# Altium PCB tank_control.PcbDoc
Units mm, origin at the board's own origin, x right, y up, seen from the top; angles counter-clockwise.
Board outline 100 x 100 mm, 2 copper layers (Top Layer, Bottom Layer); 18 components, 21 nets, 120 pads, 0 vias.
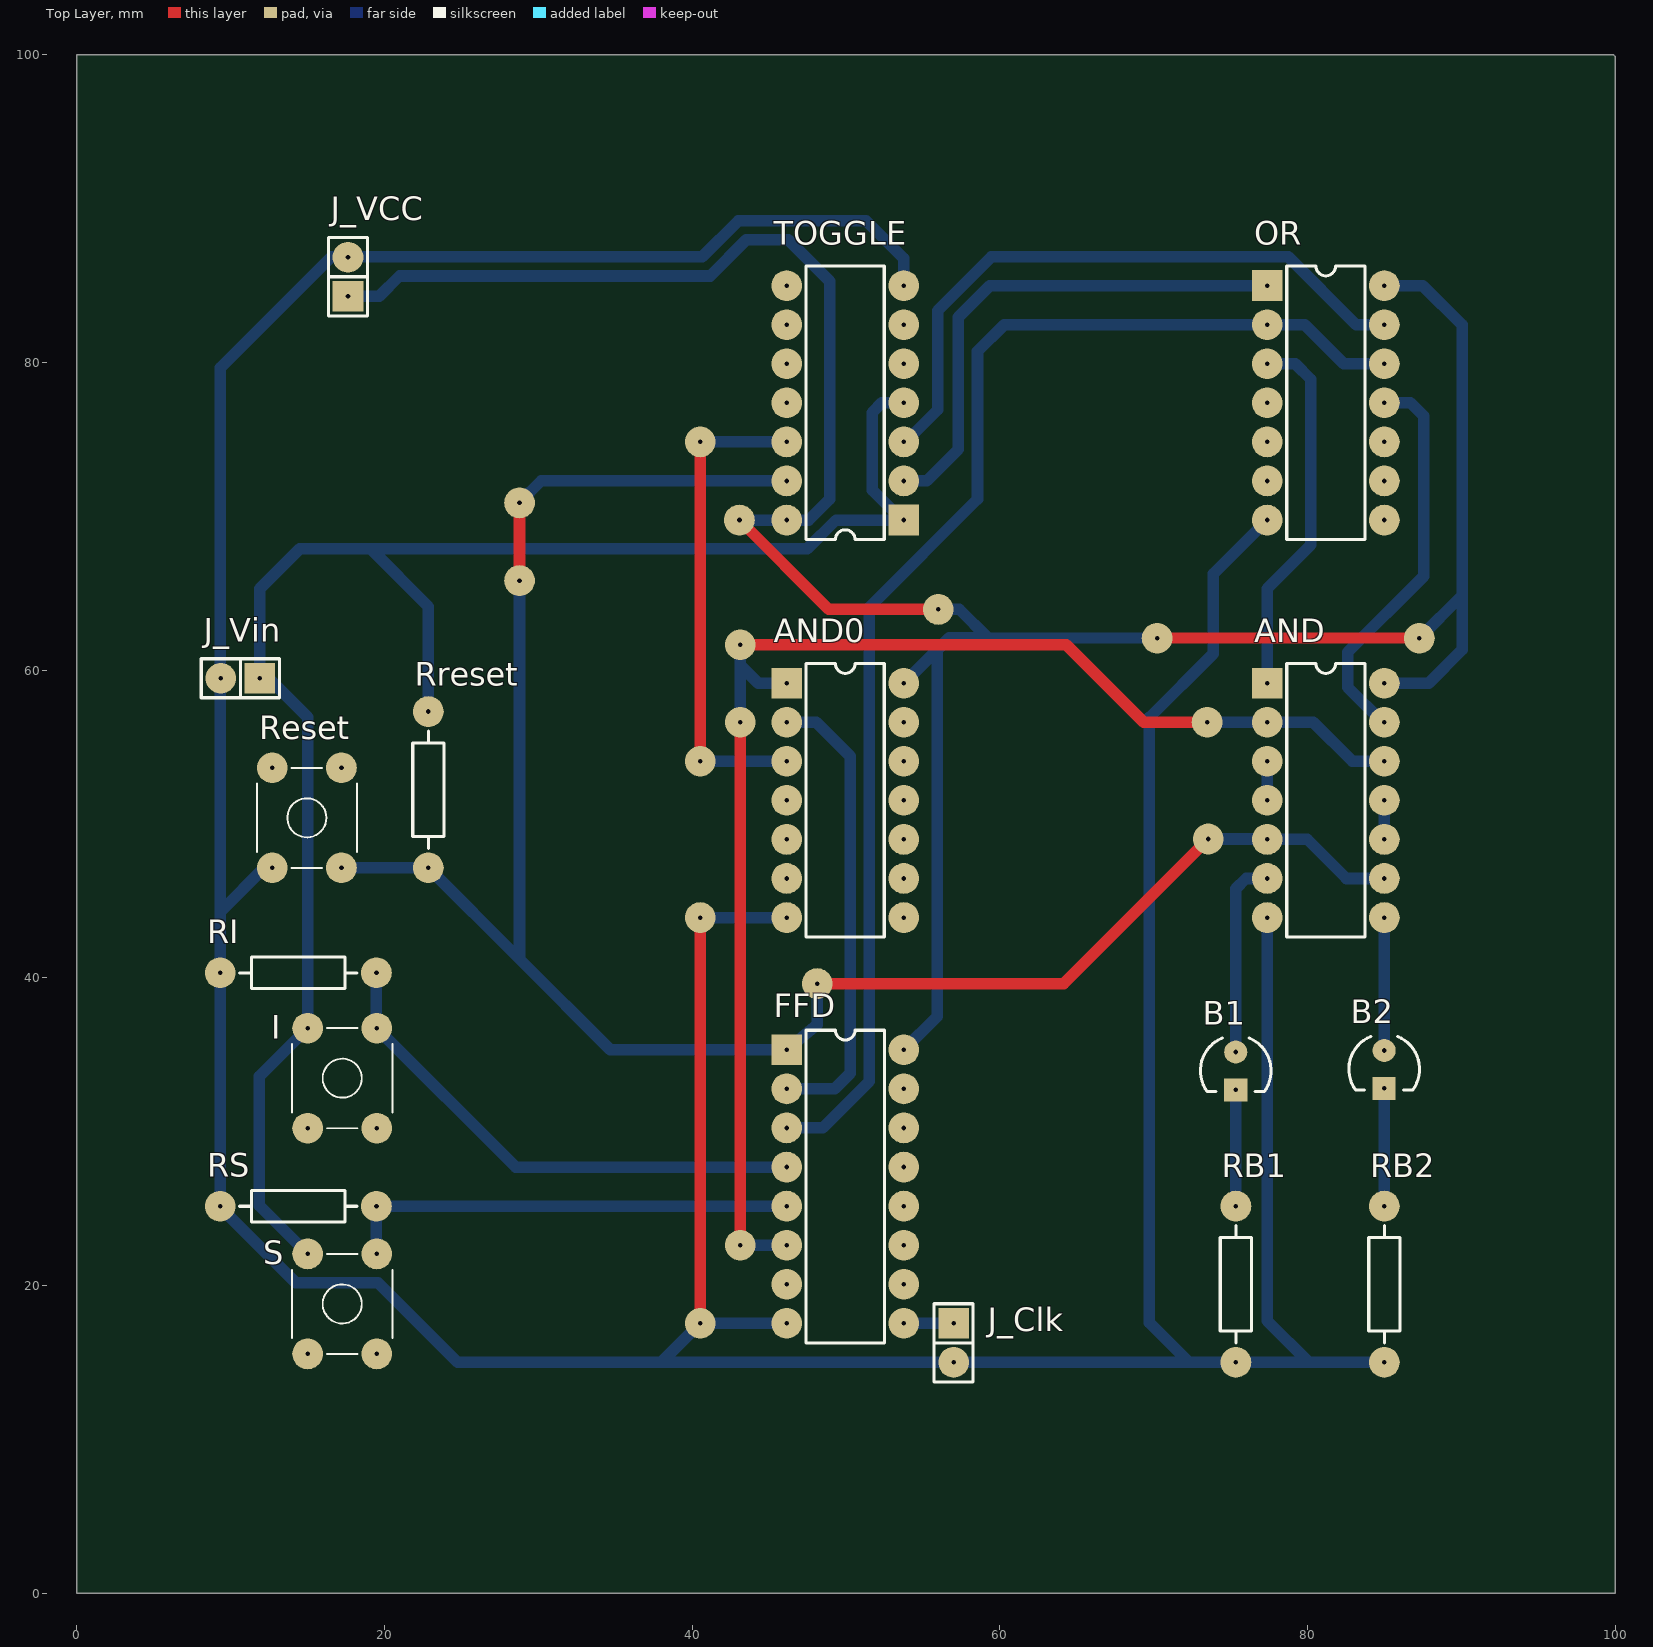
[diagram p0: Top Layer view]
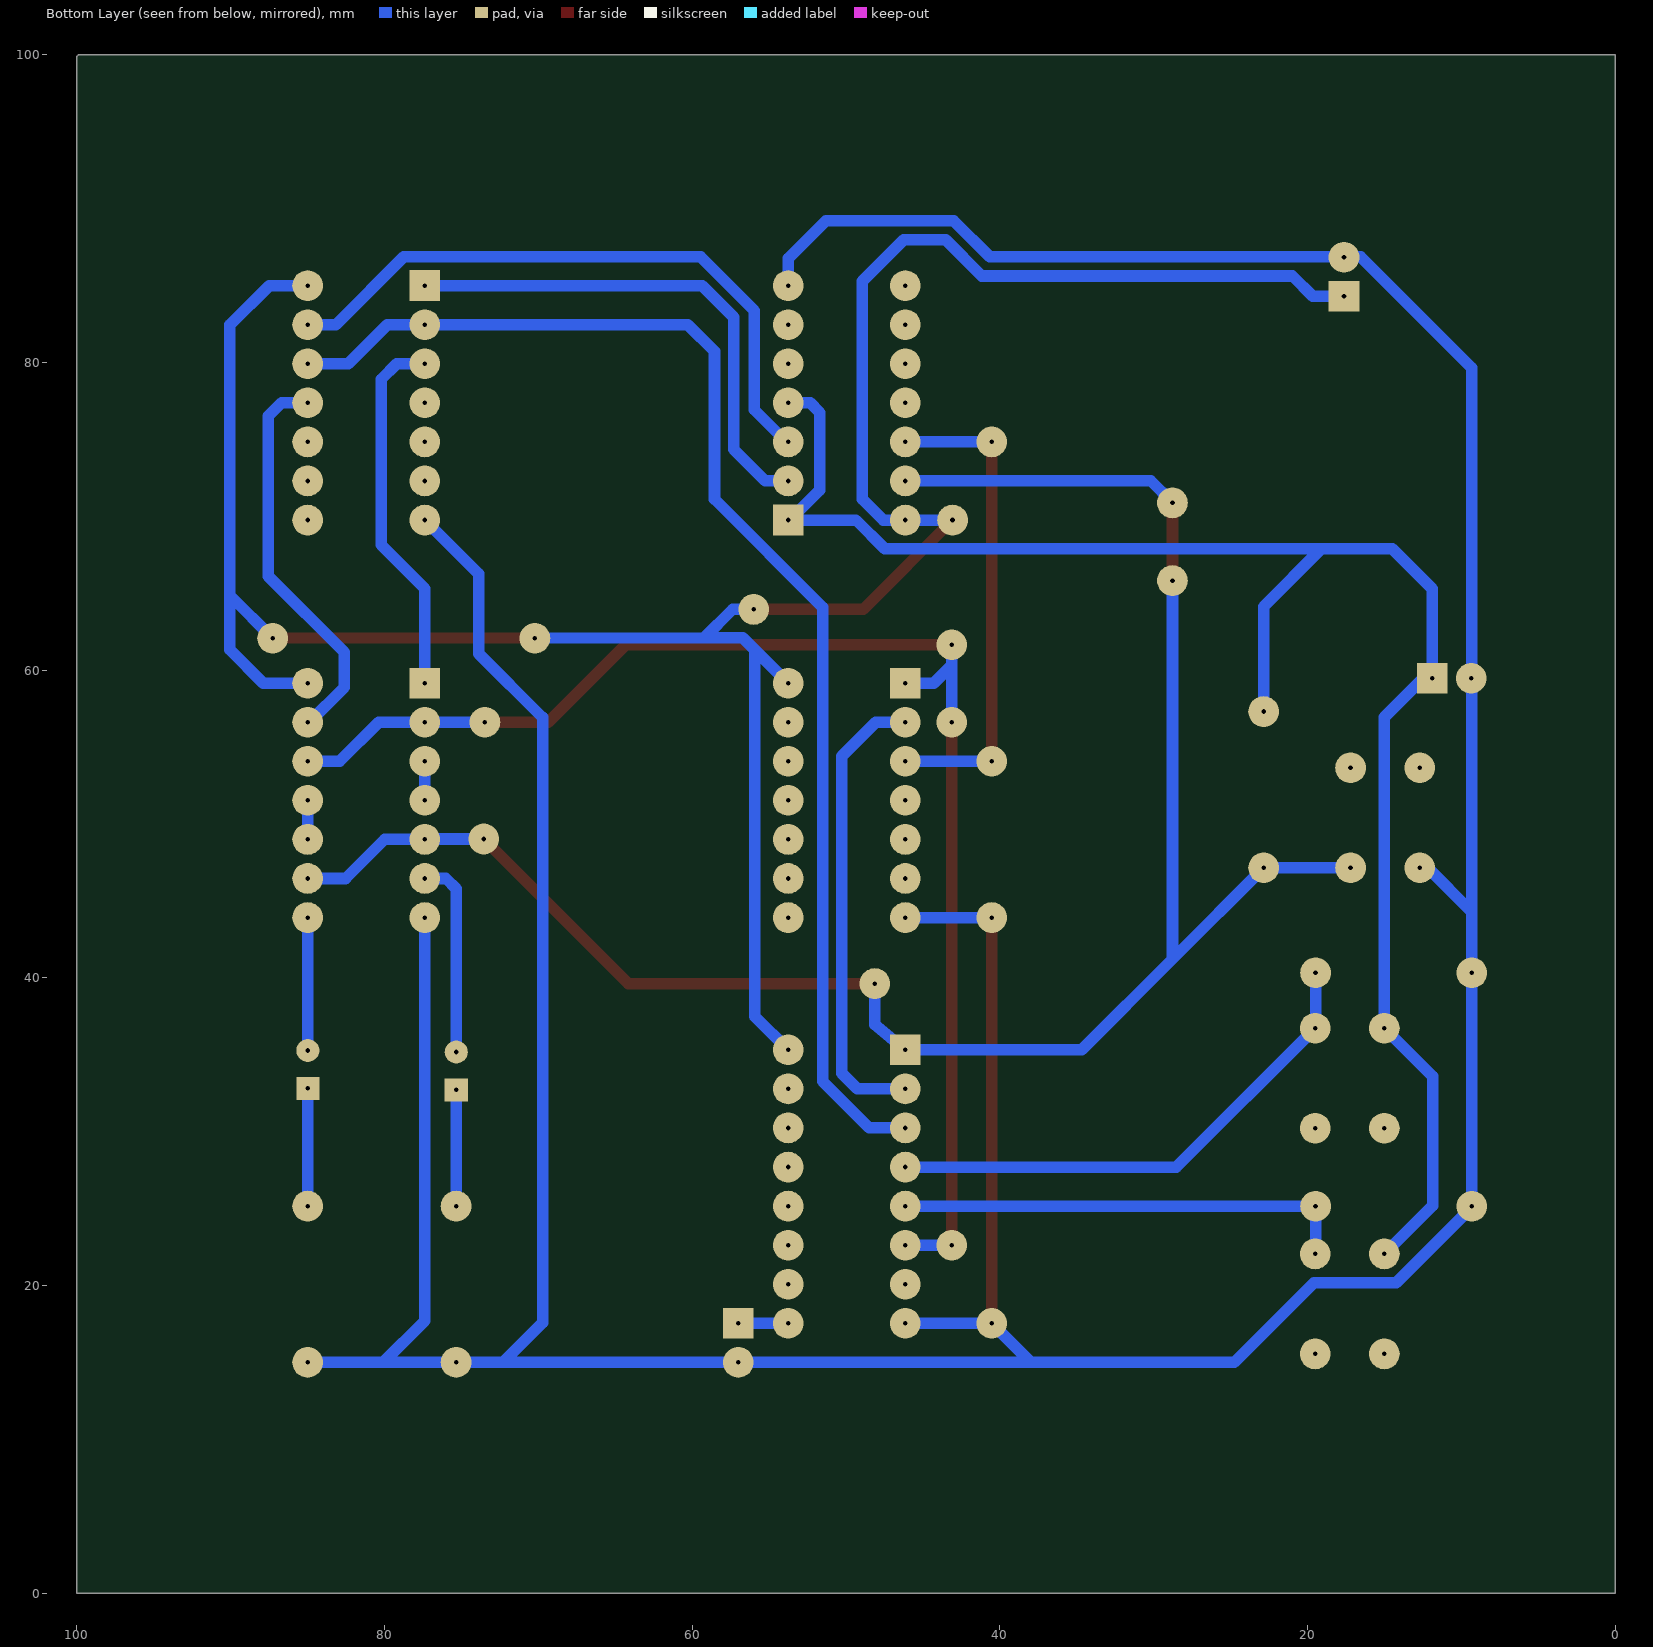
[diagram p1: Bottom Layer view, seen from below]
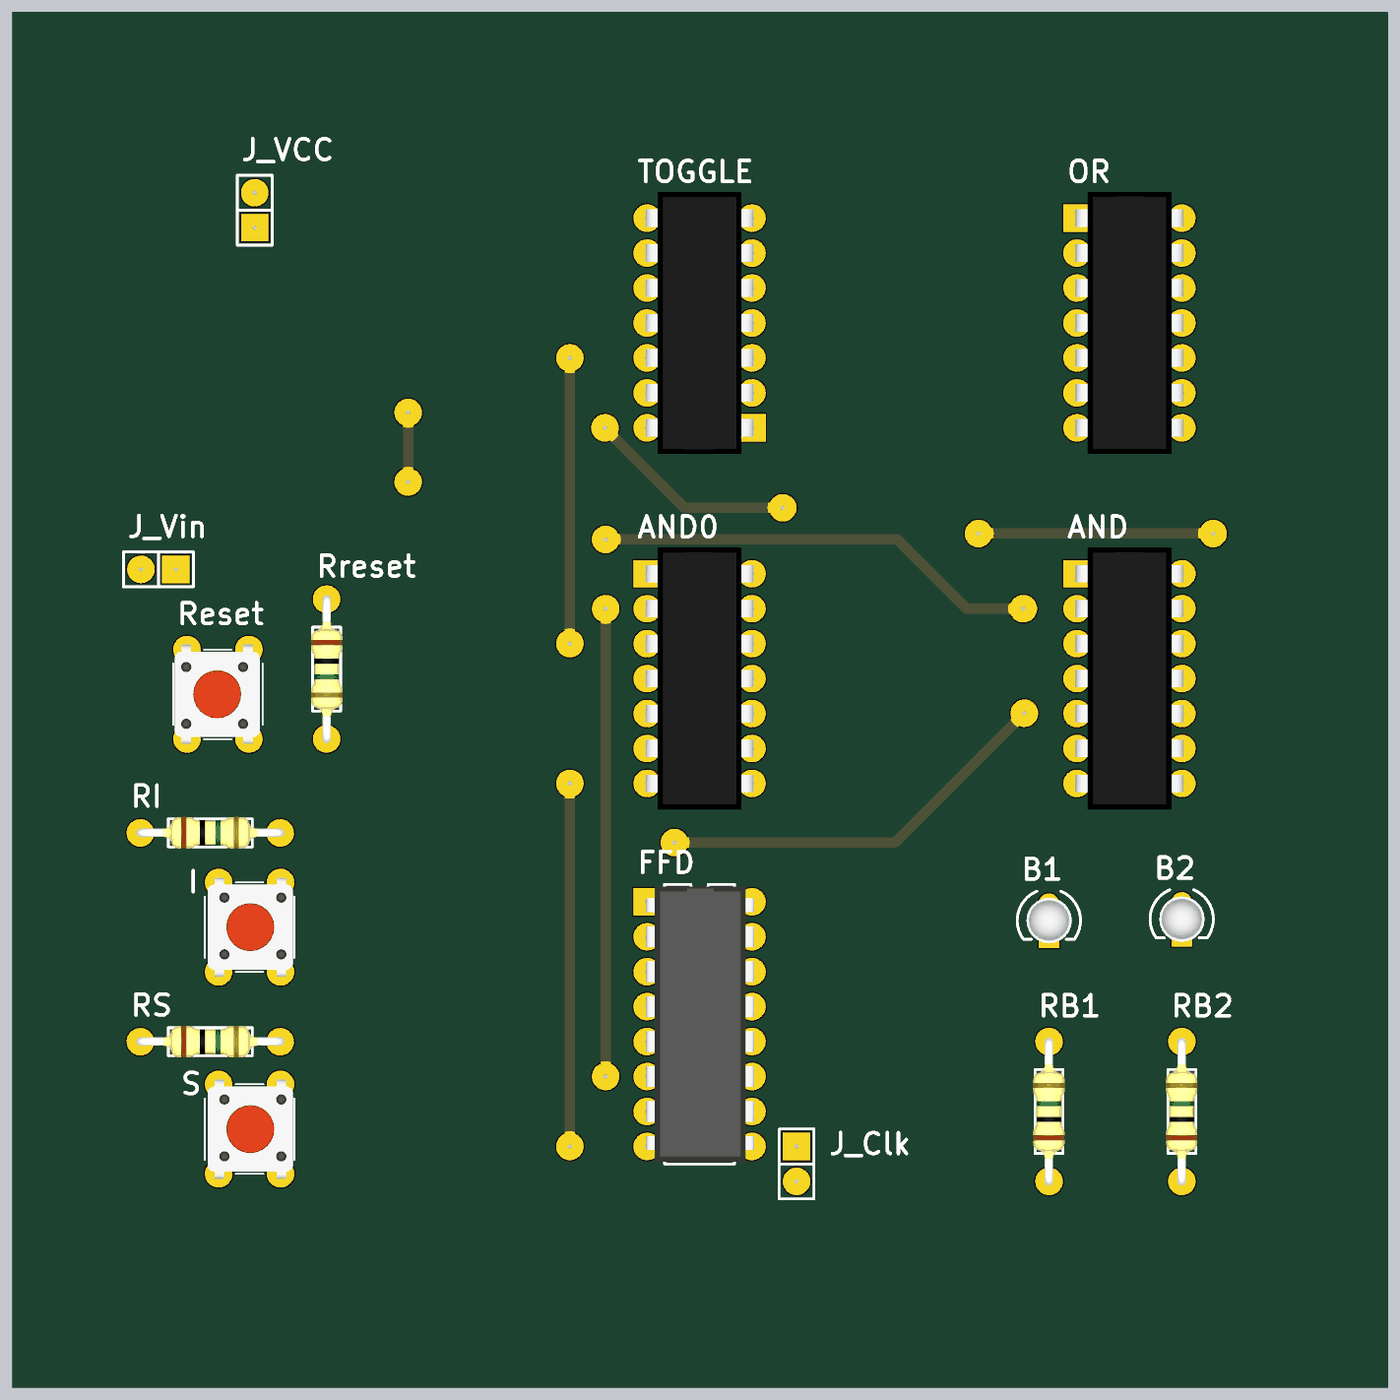
[diagram p2: 3D render of the assembled board from above, using the file's embedded part models]

## Layer stack, top to bottom
Top Solder: solder mask 0.0102, Solder Resist, Dk 3.5
Top Layer: signal copper 0.0356
Dielectric 1: dielectric 0.32, FR-4, Dk 4.8
Bottom Layer: signal copper 0.0356
Bottom Solder: solder mask 0.0102, Solder Resist, Dk 3.5

## Board outline
100,0 100,99.898 99.898,100 0,100 0,0

## Design rules (kind name [scope] priority, off if disabled: settings)
Clearance [All] p1: gap=0.5 ignorepadtopadclearanceinfootprint=FALSE
PolygonConnect [All] p1: connectstyle=Relief reliefconductorwidth=0.254 reliefentries=4 polygonreliefangle="90 Angle" airgapwidth=0.254
RoutingVias [All] p1: holewidth=0.3 width=2 viastyle="Through Hole" minholewidth=0.3 minwidth=1.5 maxholewidth=0.5 maxwidth=2
SolderMaskExpansion [All] p1: expansion=0.102
Width [All] p1: maxlimit=0.9 minlimit=0.6 preferedwidth=0.75
30 further rules are at their usual default settings.

## Components (designator, comment, footprint, x,y, rotation, side; value= is the part's Value field where it differs from the comment)
AND "74HC08" DIP14 77.38,59.158 r0 top
AND0 "74HC08" DIP14 46.141,59.158 r0 top
B1 "LED" LED3 75.335,33.957 r270 top
B2 "LED" LED3 84.987,34.057 r270 top
FFD "74HC175" DIP16 46.141,35.32 r0 top
I "BUTTON" TACTSWITCH 17.25,33.475 r0 top
J_Clk "CON2" SIP2 57,16.27 r270 top
J_VCC "CON2" SIP2 17.625,85.575 r90 top
J_Vin "CON2" SIP2 10.625,59.475 r180 top
OR "74HC32" DIP14 77.38,85 r0 top
RB1 "220" RES400 75.348,15 r90 top
RB2 "220" RES400 85,15 r90 top
Reset "BUTTON" TACTSWITCH 14.95,50.4 r180 top
RI "10k" RES400 9.315,40.325 r0 top
Rreset "10k" RES400 22.85,57.31 r270 top
RS "10k" RES400 9.315,25.15 r0 top
S "BUTTON" TACTSWITCH 17.25,18.8 r0 top
TOGGLE "74HC107" DIP14 53.761,69.76 r180 top

## Footprints (in the part's own frame and the unit in brackets; to place one, negate y for a bottom-side part, rotate by r counter-clockwise, add the part's x,y. Pads: shape width x height; smd on the part's side, far side on the other; paste and mask are expansions set on the pad)
DIP14 [mm]
  rect 2x2 hole 0.3: 1(0,0)
  round 2 hole 0.3: 2(0,-2.54) 3(0,-5.08) 4(0,-7.62) 5(0,-10.16) 6(0,-12.7) 7(0,-15.24) 8(7.62,-15.24) 9(7.62,-12.7) 10(7.62,-10.16) 11(7.62,-7.62) 12(7.62,-5.08) 13(7.62,-2.54) 14(7.62,0)
  silkscreen extent 1.27,-16.51 6.35,1.27, body extent -0.13,-17.14 7.75,1.9, height 4.19
DIP16 [mm]
  rect 2x2 hole 0.3: 1(0,0)
  round 2 hole 0.3: 2(0,-2.54) 3(0,-5.08) 4(0,-7.62) 5(0,-10.16) 6(0,-12.7) 7(0,-15.24) 8(0,-17.78) 9(7.62,-17.78) 10(7.62,-15.24) 11(7.62,-12.7) 12(7.62,-10.16) 13(7.62,-7.62) 14(7.62,-5.08) 15(7.62,-2.54) 16(7.62,0)
  silkscreen extent 1.27,-19.05 6.35,1.27, body extent -0.08,-18.89 7.79,1.11, height 1.98
LED3 [mm]
  round 1.5 hole 0.3: 1(-1.219,0)
  rect 1.5x1.5 hole 0.3: 2(1.245,0)
  silkscreen extent -2.13,-2.3 1.36,2.3, body extent -1.65,-1.63 1.65,1.66, height 0.49
RES400 [mm]
  round 2 hole 0.3: 1(0,0) 2(10.16,0)
  silkscreen extent 1.27,-1.02 8.89,1.02, body extent -0.3,-1.14 10.46,1.17, height 2.43
SIP2 [mm]
  rect 2x2 hole 0.3: 1(-1.27,0)
  round 2 hole 0.3: 2(1.27,0)
  silkscreen extent -2.54,-1.27 2.54,1.27
TACTSWITCH [mm]
  round 2 hole 0.3: 1(-2.25,-3.25) 2(-2.25,3.25) 3(2.25,-3.25) 4(2.25,3.25)
  silkscreen extent -3.25,-3.25 3.25,3.25, body extent -3.05,-3.95 3.15,3.95, height 7

## Part data
AND AND0 OR TOGGLE: library part IC_DIP14
FFD: library part IC_DIP16
I Reset S: library part "TACT SWITCH"
RB1 RB2 RI Rreset RS: library part RES

## Free pads (board coordinates)
  round 2 hole 0.3: 2(87.275,62.075) 5(70.225,62.075) 6(56,63.95) 7(43.075,69.76) 8(40.525,74.84) 9(40.525,54.078) 10(40.525,43.918) 11(40.525,17.54) 12(43.125,61.65) 13(73.475,56.618) 14(43.125,22.62) 15(43.125,56.618) 17(73.55,49.025) 18(48.125,39.625) 19(28.775,70.875) 20(28.775,65.825)

## Nets (pads, with @x,y where several pads share a name; then routed paths per layer and width w, separated by ;. In a path a pad name is that pad's centre, name@x,y a point inside that pad or via, vN(x,y) a via of type N, cw(c..) or ccw(c..) an arc to the next point about the centre after c; other vN are vias at no path point)
+VCC: AND0.14 AND.14 FFD.16 J_VCC.1 OR.14 pad.2 pad.5 pad.6 pad.7 TOGGLE.14 | length 172.6
  Top Layer w0.75: pad.7 48.885,63.95 pad.6 ; pad.5 87.25,62.1 pad.2
  Bottom Layer w0.75: J_VCC.1 19.655,84.305 20.975,85.625 41.175,85.625 43.525,87.975 46.25,87.975 48.95,85.275 48.95,71.125 47.585,69.76 TOGGLE.14 pad.7 ; FFD.16 55.925,37.484 55.925,61.322 ; AND0.14 55.925,61.322 ; pad.6 57.375,63.95 59.225,62.1 ; pad.5 59.225,62.1 ; AND.14 87.883,59.158 90.05,61.325 90.05,64.85 ; OR.14 87.5,85 90.05,82.45 90.05,64.85 ; pad.2 90.05,64.85 ; 55.925,61.322 56.703,62.1 59.225,62.1
a: AND.1 OR.3 | length 24.2
  Bottom Layer w0.75: AND.1 77.38,65.305 80.225,68.15 80.225,78.9 79.205,79.92 OR.3
b: AND.13 OR.11 | length 25.9
  Bottom Layer w0.75: AND.13 84.888,56.618 82.606,58.9 82.606,61.156 87.55,66.1 87.55,76.525 86.695,77.38 OR.11
B1: AND.6 B1.1 | length 12.9
  Bottom Layer w0.75: B1.1 75.335,45.785 76.008,46.458 AND.6
B2: AND.8 B2.1 | length 8.6
  Bottom Layer w0.75: B2.1 85,35.288 AND.8
c: AND.3 AND.4 | length 2.5
  Bottom Layer w0.75: AND.4 AND.3
Clk: FFD.9 J_Clk.1 | length 3.2
  Bottom Layer w0.75: FFD.9 J_Clk.1
d: AND.10 AND.11 | length 2.5
  Bottom Layer w0.75: AND.10 AND.11
GND: AND0.7 AND.7 FFD.8 J_Clk.2 J_VCC.2 J_Vin.2 OR.7 pad.10 pad.11 RB1.1 RB2.1 Reset.4 RI.1 RS.1 TOGGLE.7 | length 320.4
  Top Layer w0.75: pad.11 pad.10
  Bottom Layer w0.75: Reset.4 12.18,47.15 9.33,44.3 ; pad.10 AND0.7 AND0.7@46.108,43.95 ; FFD.8 pad.11 37.985,15 ; TOGGLE.7 53.761,86.764 51.3,89.225 43.007,89.225 40.657,86.875 16.55,86.875 9.33,79.655 9.33,44.3 ; AND.7 77.38,17.695 80.075,15 ; OR.7 73.875,66.255 73.875,61.075 69.725,56.925 69.725,17.575 72.3,15 ; RB2.1 80.075,15 ; 9.33,44.3 9.33,40.34 RI.1 RS.1 9.315,25.083 14.223,20.175 19.575,20.175 24.75,15 37.985,15 ; 37.985,15 J_Clk.2 72.3,15 ; 72.3,15 RB1.1 80.075,15
HALF_Indicator: AND0.3 pad.8 pad.9 TOGGLE.12 | length 32
  Top Layer w0.75: pad.9 pad.8
  Bottom Layer w0.75: pad.9 AND0.3 ; pad.8 TOGGLE.12
I: FFD.4 I.4 RI.2 | length 34
  Bottom Layer w0.75: RI.2 19.475,36.75 I.4 28.525,27.7 FFD.4
NetB1_2: B1.2 RB1.2 | length 7.6
  Bottom Layer w0.75: B1.2 75.348,32.699 RB1.2
NetB2_2: B2.2 RB2.2 | length 7.7
  Bottom Layer w0.75: B2.2 84.987,25.173 RB2.2
nReset: AND.5 AND.9 FFD.1 pad.17 pad.18 pad.19 pad.20 Reset.2 Rreset.2 TOGGLE.13 | length 128.4
  Top Layer w0.75: pad.20 pad.19 ; pad.18 64.15,39.625 pad.17
  Bottom Layer w0.75: Reset.2 Rreset.2 28.775,41.225 ; pad.20 28.775,41.225 ; pad.19@28.825,70.95 30.175,72.3 TOGGLE.13 ; pad.18 48.117,36.956 FFD.1 34.68,35.32 28.775,41.225 ; pad.17 77.352,49.025 AND.5 79.998,48.998 82.538,46.458 AND.9
nUP: OR.1 TOGGLE.2 | length 33.9
  Bottom Layer w0.75: TOGGLE.2 55.25,72.3 57.3,74.35 57.3,82.95 59.35,85 OR.1
ny0: FFD.3 OR.2 OR.12 | length 85.3
  Bottom Layer w0.75: FFD.3@46.029,30.24 FFD.3 48.49,30.24 51.525,33.275 51.525,64.1 58.55,71.125 58.55,80.725 60.285,82.46 OR.2 79.815,82.46 82.355,79.92 OR.12
ny1: AND0.1 AND.2 AND.12 FFD.6 pad.12 pad.13 pad.14 pad.15 | length 90.6
  Top Layer w0.75: pad.14 pad.15 ; pad.12 64.325,61.65 69.357,56.618 pad.13
  Bottom Layer w0.75: pad.14 FFD.6 ; pad.15 43.125,60.325 ; pad.12 43.125,60.325 ; AND0.1 44.292,59.158 43.125,60.325 ; pad.13 AND.2 80.382,56.618 82.922,54.078 AND.12
S: FFD.5 RS.2 S.4 | length 29.8
  Bottom Layer w0.75: S.4 19.475,22.075 RS.2 46.131,25.15 FFD.5
UP: OR.13 TOGGLE.3 | length 41.8
  Bottom Layer w0.75: TOGGLE.3 53.872,74.84 55.95,76.918 55.95,83.368 59.457,86.875 78.742,86.875 83.157,82.46 OR.13
Vin: I.2 J_Vin.1 Rreset.1 S.2 TOGGLE.1 TOGGLE.4 | length 114
  Bottom Layer w0.75: I.2@14.925,36.65 11.87,33.595 11.87,25.18 S.2 ; I.2 15,56.94 J_Vin.1@12.18,59.76 ; Rreset.1 22.85,64.135 19.1,67.885 ; TOGGLE.1 TOGGLE.1@53.649,69.76 ; TOGGLE.4 52.33,77.38 51.7,76.75 51.7,71.709 TOGGLE.1@53.649,69.76 ; J_Vin.1@11.895,60.045 J_Vin.1@12.18,59.76 ; J_Vin.1@11.895,60.045 11.895,65.295 14.485,67.885 19.1,67.885 ; J_Vin.1@11.895,60.045 J_Vin.1 J_Vin.1@12.18,59.76 ; 19.1,67.885 47.478,67.885 49.353,69.76 TOGGLE.1@53.649,69.76
y0: AND0.2 FFD.2 | length 30.2
  Bottom Layer w0.75: FFD.2 49.262,32.78 50.275,33.793 50.275,54.4 48.057,56.618 AND0.2
pads on no net: AND0.4 AND0.5 AND0.6 AND0.8 AND0.9 AND0.10 AND0.11 AND0.12 AND0.13 FFD.7 FFD.10 FFD.11 FFD.12 FFD.13 FFD.14 FFD.15 I.1 I.3 OR.4 OR.5 OR.6 OR.8 OR.9 OR.10 Reset.1 Reset.3 S.1 S.3 TOGGLE.5 TOGGLE.6 TOGGLE.8 TOGGLE.9 TOGGLE.10 TOGGLE.11